# Altium PCB pcb-lcd-cnc.PcbDoc
Units mm, origin at the board's own origin, x right, y up, seen from the top; angles counter-clockwise.
Board outline 96.9 x 63.14 mm, 2 copper layers (Top Layer, Bottom Layer); 22 components, 40 nets, 120 pads, 47 vias.
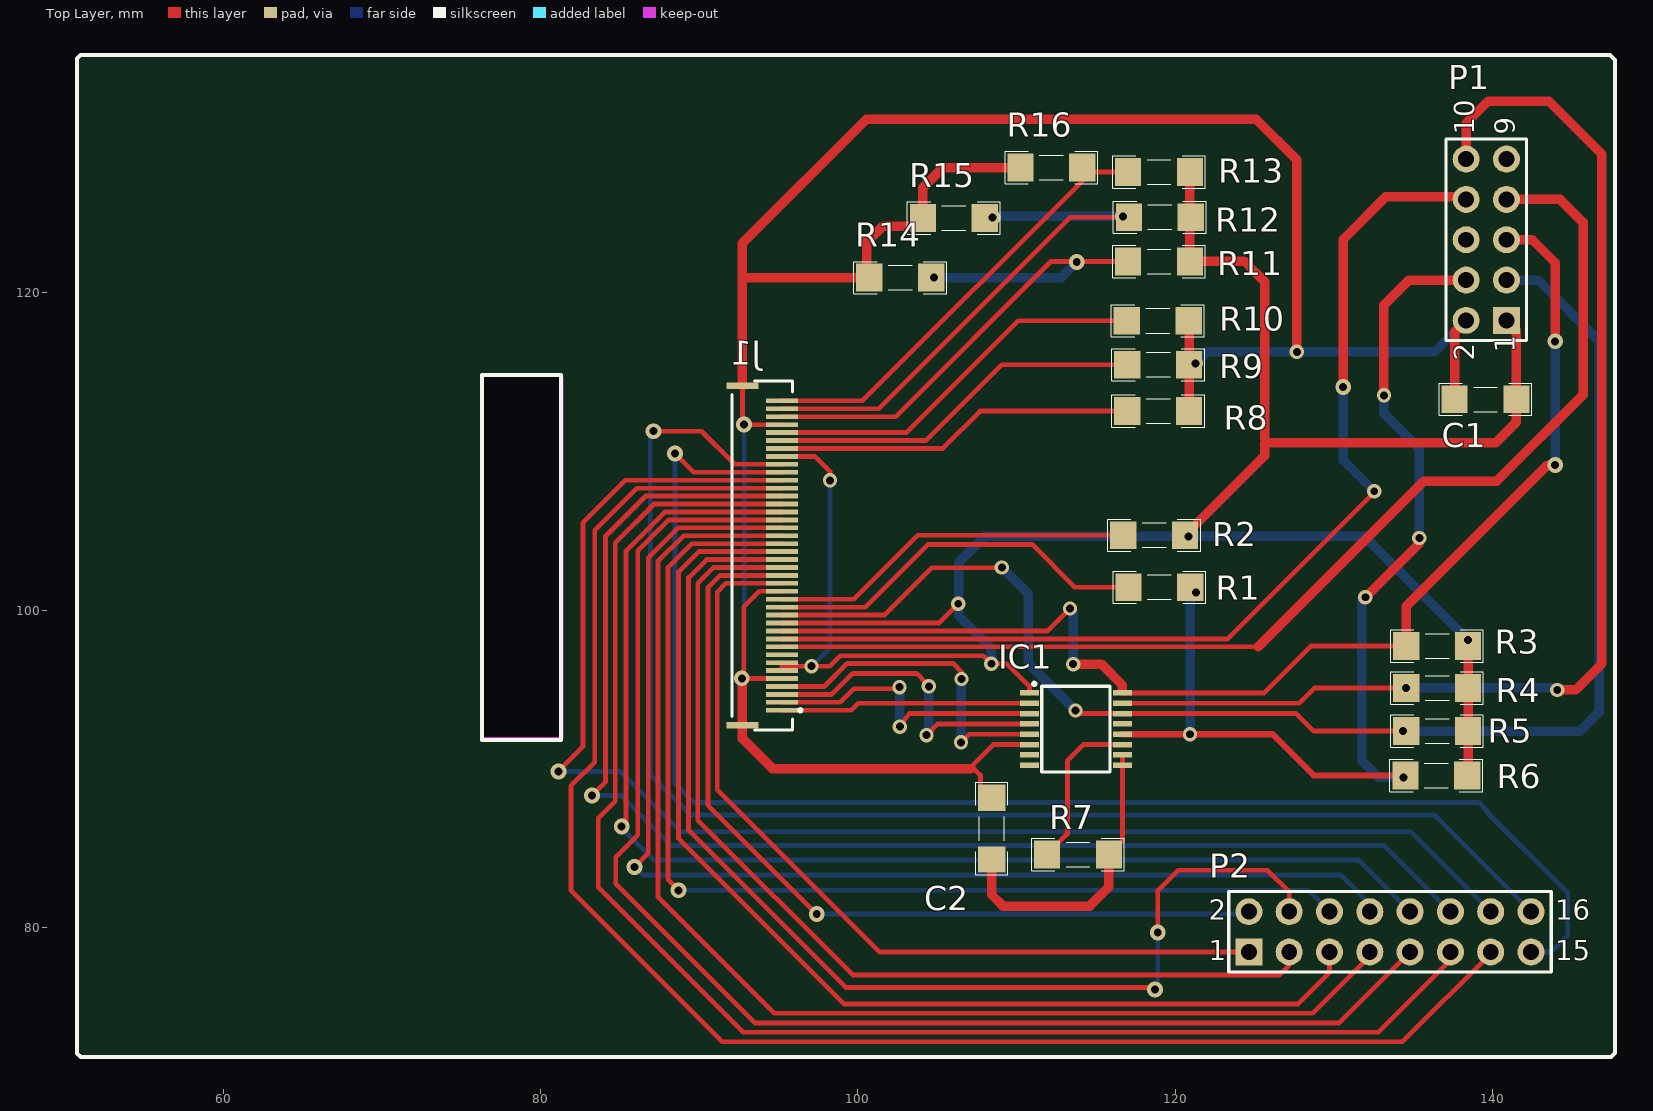
[diagram p0: Top Layer view]
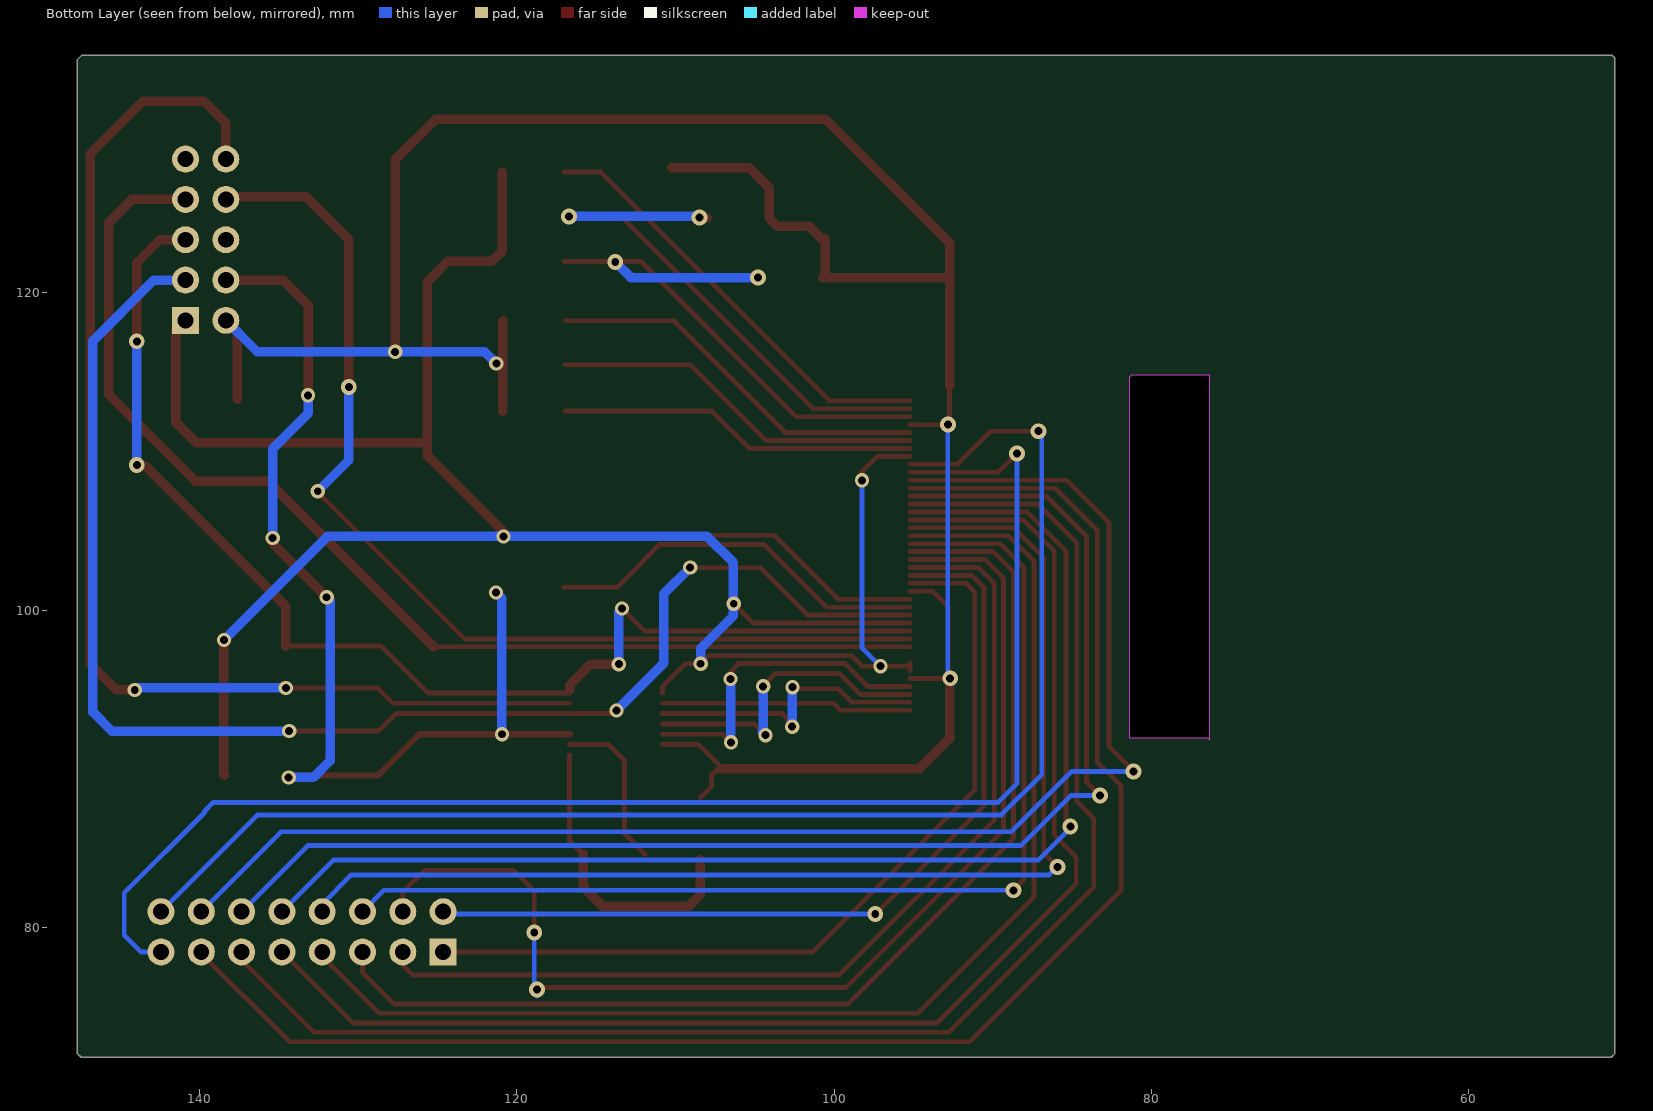
[diagram p1: Bottom Layer view, seen from below]
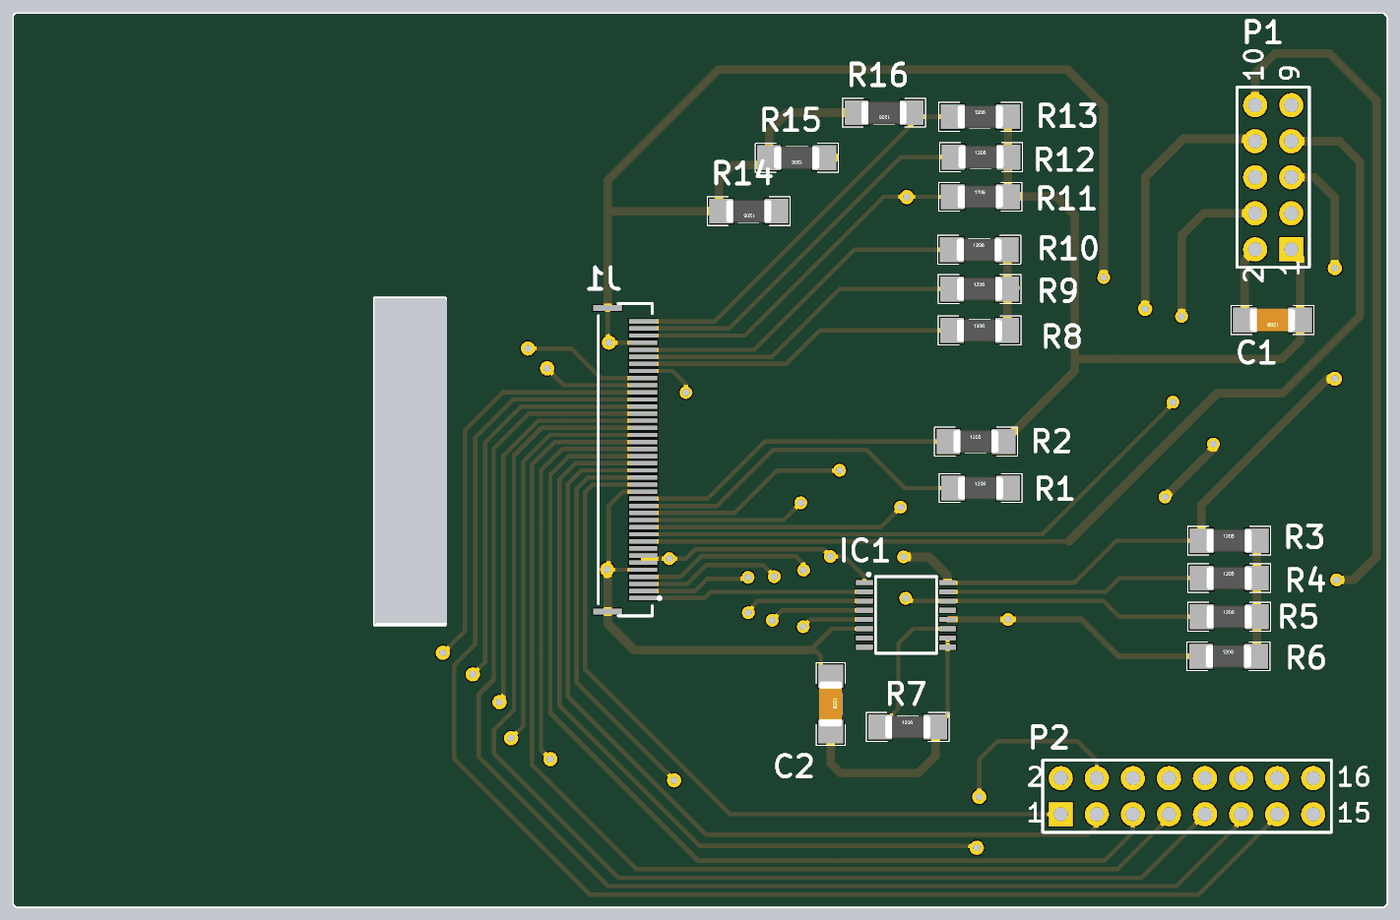
[diagram p2: 3D render of the assembled board from above, using the file's embedded part models]

## Layer stack, top to bottom
Top Solder: solder mask 0.0102, Solder Resist, Dk 3.5
Top Layer: signal copper 0.0356
Dielectric 1: dielectric 0.32, FR-4, Dk 4.8
Bottom Layer: signal copper 0.0356
Bottom Solder: solder mask 0.0102, Solder Resist, Dk 3.5

## Board outline
51.029,71.831 50.8,72.06 50.8,134.772 51.003,134.976 147.396,134.976 147.701,134.671 147.701,72.085 147.447,71.831
cut-out: 76.327,114.808 81.28,114.808 81.407,114.681 81.407,91.948 76.454,91.948 76.327,91.821

## Design rules (kind name [scope] priority, off if disabled: settings)
Clearance [All] p1: gap=0.1 ignorepadtopadclearanceinfootprint=FALSE
PolygonConnect [All] p1: connectstyle=Relief reliefconductorwidth=0.254 reliefentries=4 polygonreliefangle="90 Angle" airgapwidth=0.254
RoutingVias [All] p1: holewidth=0.711 width=1.27 viastyle="Through Hole" minholewidth=0.711 minwidth=1.27 maxholewidth=0.711 maxwidth=1.27
SolderMaskExpansion [All] p1: expansion=0.102
Width [All] p1: maxlimit=0.6 minlimit=0.2 preferedwidth=0.3
30 further rules are at their usual default settings.

## Components (designator, comment, footprint, x,y, rotation, side; value= is the part's Value field where it differs from the comment)
C1 "0.1uF" CAPC4817X12N 139.548,113.284 r180 top
C2 "0.1uF" CAPC4817X12N 108.433,86.233 r270 top
IC1 "XPT2046" TSSOP16 113.741,92.507 r0 top
J1 "FFC2B28-40-G" GCT_FFC2B28-40-G 93.975,103.44 r90 top
P1 "Header 5X2" HDR2X5 140.868,118.262 r90 top
P2 "Header 8X2" HDR2X8 124.638,78.461 r0 top
R1 "1K" RESC4817X04N 118.999,101.448 r0 top
R2 "1K" RESC4817X04N 118.669,104.724 r0 top
R3 "1K" RESC4817X04N 136.5,97.739 r0 top
R4 "1K" RESC4817X04N 136.5,95.098 r0 top
R5 "1K" RESC4817X04N 136.5,92.38 r0 top
R6 "1K" RESC4817X04N 136.449,89.586 r0 top
R7 "1K" RESC4817X04N 113.868,84.607 r0 top
R8 "1K" RESC4817X04N 118.923,112.547 r0 top
R9 "1K" RESC4817X04N 118.923,115.468 r0 top
R10 "1K" RESC4817X04N 118.897,118.237 r0 top
R11 "1K" RESC4817X04N 118.974,121.971 r0 top
R12 "1K" RESC4817X04N 119.024,124.765 r0 top
R13 "1K" RESC4817X04N 118.974,127.61 r0 top
R14 "1K" RESC4817X04N 102.667,120.955 r180 top
R15 "1K" RESC4817X04N 106.045,124.714 r180 top
R16 "1K" RESC4817X04N 112.192,127.889 r180 top

## Footprints (in the part's own frame and the unit in brackets; to place one, negate y for a bottom-side part, rotate by r counter-clockwise, add the part's x,y. Pads: shape width x height; smd on the part's side, far side on the other; paste and mask are expansions set on the pad)
CAPC4817X12N [mm] "Chip Capacitor, 2-Leads, Body 4/80x1/70mm, IPC Medium Density-Design:Abbas Basereh"
  rect 1.65x1.75 smd: 1(-1.95,0) 2(1.95,0)
  silkscreen extent -2.92,-1.02 2.92,1.02, body extent -1.6,-0.8 1.6,0.8, height 1
GCT_FFC2B28-40-G [mm]
  rect 0.3x2 smd: 1(-9.75,-1.25) 2(-9.25,-1.25) 3(-8.75,-1.25) 4(-8.25,-1.25) 5(-7.75,-1.25) 6(-7.25,-1.25) 7(-6.75,-1.25) 8(-6.25,-1.25) 9(-5.75,-1.25) 10(-5.25,-1.25) 11(-4.75,-1.25) 12(-4.25,-1.25) 13(-3.75,-1.25) 14(-3.25,-1.25) 15(-2.75,-1.25) 16(-2.25,-1.25) 17(-1.75,-1.25) 18(-1.25,-1.25) 19(-0.75,-1.25) 20(-0.25,-1.25) 21(0.25,-1.25) 22(0.75,-1.25) 23(1.25,-1.25) 24(1.75,-1.25) 25(2.25,-1.25) 26(2.75,-1.25) 27(3.25,-1.25) 28(3.75,-1.25) 29(4.25,-1.25) 30(4.75,-1.25) 31(5.25,-1.25) 32(5.75,-1.25) 33(6.25,-1.25) 34(6.75,-1.25) 35(7.25,-1.25) 36(7.75,-1.25) 37(8.25,-1.25) 38(8.75,-1.25) 39(9.25,-1.25) 40(9.75,-1.25)
  rect 0.4x2 smd: S1(-10.7,1.25) S2(10.7,1.25)
  silkscreen extent -11,-2.5 11,1.9
HDR2X5 [mm] "Connector; Header; 5x2 Position"
  rect 1.7x1.7 hole 1: 1(0,0)
  round 1.7 hole 1: 2(0,2.54) 3(2.54,0) 4(2.54,2.54) 5(5.08,0) 6(5.08,2.54) 7(7.62,0) 8(7.62,2.54) 9(10.16,0) 10(10.16,2.54)
  silkscreen extent -1.27,-1.27 11.43,3.81
HDR2X8 [mm] "Connector; Header; 8x2 Position"
  rect 1.7x1.7 hole 1: 1(0,0)
  round 1.7 hole 1: 2(0,2.54) 3(2.54,0) 4(2.54,2.54) 5(5.08,0) 6(5.08,2.54) 7(7.62,0) 8(7.62,2.54) 9(10.16,0) 10(10.16,2.54) 11(12.7,0) 12(12.7,2.54) 13(15.24,0) 14(15.24,2.54) 15(17.78,0) 16(17.78,2.54)
  silkscreen extent -1.27,-1.27 19.05,3.81
RESC4817X04N [mm] "Chip Resistor, 2-Leads, Body 4/80x1/70mm, IPC Medium Density-Design:Abbas Basereh"
  rect 1.65x1.75 smd: 1(-1.95,0) 2(1.95,0)
  silkscreen extent -2.92,-1.02 2.92,1.02, body extent -1.6,-0.8 1.6,0.8, height 1
TSSOP16 [mm]
  rect 1.2x0.35 smd: 1(-2.925,2.275) 2(-2.925,1.625) 3(-2.925,0.975) 4(-2.925,0.325) 5(-2.925,-0.325) 6(-2.925,-0.975) 7(-2.925,-1.625) 8(-2.925,-2.275) 9(2.925,-2.275) 10(2.925,-1.625) 11(2.925,-0.975) 12(2.925,-0.325) 13(2.925,0.325) 14(2.925,0.975) 15(2.925,1.625) 16(2.925,2.275)
  silkscreen extent -2.72,-2.7 2.15,2.95

## Part data
C1 C2: library part "CAP SMD 1206", "CAP 1206", Data=16-12-2016, Desc.="CAP SMD 1206", Designer="Abbas Basereh"
IC1: "RASPBERRY PI 3.5 TFT DISPLAY", Package=Package, Availability="Not in stock", Check_prices=https://www.snapeda.com/parts/XPT2046/Xptek/view-part/?ref=eda, MF=Xptek, MP=XPT2046, Price=None, SnapEDA_Link=https://www.snapeda.com/parts/XPT2046/Xptek/view-part/?ref=snap
J1: "40 Position FFC, FPC Connector Contacts, Top and Bottom 0.020 _0.50mm_ Surface Mount, Right Angle", Package="Package Analog Devices", Availability=Unavailable, MF="Global Connector Technology", MP=FFC2B28-40-G, Price=None, SnapEDA_Link=https://www.snapeda.com/parts/FFC2B28-40-G/Global%20Connector%20Technology/view-part/4223068/?ref=snap
P1: "Header, 5-Pin, Dual row", LatestRevisionDate=17-Jul-2002, LatestRevisionNote="Re-released for DXP Platform.", Publisher="Altium Limited"
P2: "Header, 8-Pin, Dual row", LatestRevisionDate=17-Jul-2002, LatestRevisionNote="Re-released for DXP Platform.", Publisher="Altium Limited"
R1 R2 R3 R4 R5 R6 R7 R8 R9 R10 R11 R12 R13 R14 R15 R16: library part "RES 1206 0.25W", "RES 1206", Data=16-12-2016, Desc.="RES SMD 1206", Designer="Abbas Basereh"

## Via types
v1: diameter 0.9, hole 0.5, Top Layer to Bottom Layer, 28 vias
v2: diameter 1, hole 0.5, Top Layer to Bottom Layer, 19 vias

## Nets (pads, with @x,y where several pads share a name; then routed paths per layer and width w, separated by ;. In a path a pad name is that pad's centre, name@x,y a point inside that pad or via, vN(x,y) a via of type N, cw(c..) or ccw(c..) an arc to the next point about the centre after c; other vN are vias at no path point)
cs_lcd: J1.9 P1.7 | length 73.3
  Top Layer w0.3: J1.9 125.223,97.69
  Top Layer w0.6: 125.223,97.69 135.661,108.128 140.259,108.128 145.694,113.563 145.694,124.435 144.247,125.882 P1.7
cs_touch: IC1.15 P1.10 R4.1 | length 76.2
  Top Layer w0.3: IC1.15 127.812,94.132 128.778,95.098 v1(134.55,95.098)
  Top Layer w0.6: P1.10 138.328,130.683 139.725,132.08 143.535,132.08 146.888,128.727 146.888,96.622 145.237,94.971 v1(144.069,94.971)
  Bottom Layer w0.6: v1(134.55,95.098) v1@144.069,95.098
d0: J1.17 P2.1 | length 54.5
  Top Layer w0.3: J1.17 91.682,101.69 91.135,101.143 91.135,88.671 101.346,78.461 P2.1
d1: J1.18 P2.2 | length 55.7
  Top Layer w0.3: J1.18 91.319,102.19 90.551,101.422 90.551,87.706 v2(97.409,80.848)
  Bottom Layer w0.3: v2(97.409,80.848) 124.485,80.848 P2.2
d2: J1.19 P2.3 | length 63
  Top Layer w0.3: J1.19 90.904,102.69 89.916,101.702 89.916,86.766 99.67,77.013 126.568,77.013 127.178,77.622 P2.3
d3: J1.20 P2.4 | length 73.5
  Top Layer w0.3: J1.20 90.464,103.19 89.332,102.057 89.332,86.131 99.238,76.225 118.313,76.225 v2@118.618,75.921 ; v2(118.897,79.68) 118.897,82.321 120.193,83.617 125.806,83.617 127.178,82.245 P2.4
  Bottom Layer w0.3: v2(118.72,76.098) 118.72,75.692 118.897,75.87 v2(118.897,79.68)
d4: J1.21 P2.5 | length 71.3
  Top Layer w0.3: J1.21 89.974,103.69 88.697,102.413 88.697,85.598 99.111,75.184 127.737,75.184 129.718,77.165 P2.5
d5: J1.22 P2.6 | length 70
  Top Layer w0.3: v2(88.697,82.347) 88.036,83.007 88.036,102.692 89.534,104.19 J1.22
  Bottom Layer w0.3: v2(88.697,82.347) 128.372,82.347 P2.6
d6: J1.23 P2.7 | length 79.3
  Top Layer w0.3: J1.23 89.018,104.69 87.401,103.073 87.401,81.94 94.742,74.6 128.651,74.6 132.258,78.207 P2.7
d7: J1.24 P2.8 | length 76.7
  Top Layer w0.3: v2@86.042,83.934 86.792,84.684 86.792,103.302 88.68,105.19 J1.24
  Bottom Layer w0.3: v2(85.928,83.82) 86.436,83.312 130.429,83.312 132.258,81.483 P2.8
d8: J1.25 P2.9 | length 87
  Top Layer w0.3: J1.25 88.088,105.69 86.131,103.734 86.131,85.827 84.734,84.43 84.734,82.753 93.497,73.99 130.327,73.99 P2.9
d9: J1.26 P2.10 | length 80.1
  Top Layer w0.3: v2(85.115,86.36) 85.395,86.639 85.395,103.734 87.851,106.19 J1.26
  Bottom Layer w0.3: v2@84.938,86.36 v2(85.115,86.36) ; v2@85.344,86.03 87.122,84.252 131.547,84.252 P2.10
d10: J1.27 P2.11 | length 93.6
  Top Layer w0.3: J1.27 87.157,106.69 84.709,104.242 84.709,87.96 83.642,86.893 83.642,82.525 92.761,73.406 132.791,73.406 137.338,77.953 P2.11
d11: J1.28 P2.12 | length 86
  Top Layer w0.3: v2(83.236,88.316) 84.099,89.179 84.099,104.673 86.616,107.19 J1.28
  Bottom Layer w0.3: v2(83.236,88.316) 85.09,88.316 88.24,85.166 133.172,85.166 P2.12
d12: J1.29 P2.13 | length 100.5
  Top Layer w0.3: J1.29 86.074,107.69 83.414,105.029 83.414,90.424 81.915,88.925 81.915,82.347 91.465,72.796 134.315,72.796 139.878,78.359 P2.13
d13: J1.30 P2.14 | length 92.4
  Top Layer w0.3: v2(81.128,89.84) 82.677,91.389 82.677,105.512 85.355,108.19 J1.30
  Bottom Layer w0.3: v2(81.128,89.84) 85.014,89.84 88.824,86.03 134.849,86.03 P2.14
d14: J1.31 P2.15 | length 92.6
  Top Layer w0.3: v2(88.468,109.88) 89.659,108.69 J1.31
  Bottom Layer w0.3: v2(88.468,109.88) 88.468,89.078 89.662,87.884 139.116,87.884 139.675,87.325 139.675,87.249 144.729,82.194 144.729,79.502 143.688,78.461 P2.15
d15: J1.32 P2.16 | length 89.8
  Top Layer w0.3: v2(87.122,111.277) 90.145,111.277 92.232,109.19 J1.32
  Bottom Layer w0.3: v2@86.919,111.277 86.919,89.637 89.459,87.097 136.322,87.097 P2.16 ; v2@87.071,111.328 v2(87.122,111.277)
GND: C1.2 C2.1 IC1.6 J1.5 J1.16 J1.37 J1.S1 J1.S2 P1.2 R8.2 R9.2 R10.2 R14.2 R15.2 R16.2 | length 169.4
  Top Layer w0.3: v2@92.725,95.707 92.812,95.794 92.812,100.203 93.798,101.19 J1.16 ; J1.S2 92.725,111.797 v2(92.832,111.69) J1.37 ; v2@92.767,95.69 J1.5 ; C2.1 107.721,88.894 107.721,89.611 107.315,90.018 107.01,90.018 108.524,91.532 IC1.6
  Top Layer w0.6: v2@92.725,95.707 J1.S1 92.725,91.908 94.615,90.018 107.112,90.018 ; J1.S2 92.725,120.955 ; R16.2 105.359,127.889 104.095,126.625 R15.2 103.587,124.206 101.575,124.206 100.762,123.393 100.559,123.393 100.559,121.113 R14.2 92.725,120.955 ; R10.2 120.873,118.212 R9.2@120.873,115.545 ; R8.2 R9.2 ; v1(127.66,116.281) 127.66,128.372 125.095,130.937 100.533,130.937 92.725,123.128 92.725,120.955 ; C1.2 137.598,117.532 P1.2
  Bottom Layer w0.3: v2(92.685,95.707) 92.634,95.707 92.832,95.906 v2(92.832,111.69)
  Bottom Layer w0.6: v1(121.285,115.545) 122.022,116.281 v1(127.66,116.281) 136.347,116.281 P1.2
miso: IC1.12 P1.4 R1.2 R6.1 | length 68.2
  Top Layer w0.3: v1(134.372,89.459) R6.1
  Top Layer w0.4: IC1.12 v1(120.929,92.182) 126.131,92.182 128.727,89.586 R6.1
  Top Layer w0.6: v1(131.978,100.813) 135.382,104.216 v1(135.382,104.546) ; v1(133.147,113.538) 133.147,119.228 134.722,120.802 P1.4
  Bottom Layer w0.6: v1(120.929,92.182) 120.929,100.736 v1(121.31,101.117) ; v1(131.978,100.813) 131.75,100.584 131.75,90.526 132.817,89.459 v1(134.372,89.459) ; v1(133.147,113.538) 133.147,112.395 135.382,110.16 v1(135.382,104.546)
mosi: IC1.14 J1.13 P1.3 R5.1 | length 91
  Top Layer w0.3: J1.13 101.671,99.69 104.648,102.667 v1@109.017,102.667 ; v1(113.716,93.675) 113.909,93.482 IC1.14 127.625,93.482 128.727,92.38 v1(134.341,92.38) R5.1
  Bottom Layer w0.6: v1(109.068,102.692) 110.744,101.016 110.744,96.647 v1(113.716,93.675) ; v1(134.341,92.38) 145.517,92.38 146.71,93.574 146.71,116.967 142.875,120.802 P1.3
NetC2_2: C2.2 IC1.9 IC1.10 R7.2 | length 19.1
  Top Layer w0.3: R7.2 116.666,85.455 IC1.9 IC1.10
  Top Layer w0.6: C2.2 108.433,82.067 109.144,81.356 114.605,81.356 115.818,82.57 R7.2
NetIC1_11: IC1.11 R7.1 | length 10.3
  Top Layer w0.3: R7.1 113.208,85.897 113.208,90.526 114.214,91.532 IC1.11
NetJ1_14: J1.14 R1.1 | length 24.6
  Top Layer w0.3: J1.14 100.469,100.19 104.419,104.14 110.973,104.14 113.665,101.448 R1.1
NetJ1_15: J1.15 R2.1 | length 23.2
  Top Layer w0.3: J1.15 99.75,100.69 103.784,104.724 R2.1
NetJ1_34: J1.34 R8.1 | length 22.7
  Top Layer w0.3: J1.34 105.338,110.19 107.696,112.547 R8.1
NetJ1_35: J1.35 R9.1 | length 23.7
  Top Layer w0.3: J1.35 104.289,110.69 109.068,115.468 R9.1
NetJ1_36: J1.36 R10.1 | length 24.6
  Top Layer w0.3: J1.36 103.062,111.19 110.109,118.237 R10.1
NetJ1_38: J1.38 R11.1 R14.1 | length 35.4
  Top Layer w0.3: J1.38 102.385,112.19 112.166,121.971 R11.1
  Top Layer w0.6: R14.1 v2(104.8,120.955)
  Bottom Layer w0.6: v2(104.8,120.955) 112.801,120.955 v2(113.792,121.945)
NetJ1_39: J1.39 R12.1 R15.1 | length 35.3
  Top Layer w0.3: J1.39 101.311,112.69 113.386,124.765 R12.1@116.713,124.765
  Top Layer w0.6: R15.1 108.458,124.714 v2(108.483,124.739)
  Bottom Layer w0.6: v2(108.483,124.739) 108.56,124.816 v2(116.713,124.816)
NetJ1_40: J1.40 R13.1 R16.1 | length 27.8
  Top Layer w0.3: J1.40 100.287,113.19 114.706,127.61 R13.1
NetLabel103: P1.6
NetLabel108: P1.9
rs: J1.10 P1.8 | length 66.9
  Top Layer w0.2: v1(132.537,107.493) v1@132.613,107.493
  Top Layer w0.3: J1.10 123.31,98.19 v1@132.613,107.493 ; P1.8@138.151,126.06 P1.8
  Top Layer w0.6: v2(130.581,114.071) 130.581,123.368 133.274,126.06 P1.8@138.151,126.06
  Bottom Layer w0.6: v2(130.581,114.071) 130.581,109.449 v1(132.537,107.493)
sck: IC1.16 J1.11 P1.5 R3.1 | length 77.6
  Top Layer w0.2: IC1.16 116.666,94.971
  Top Layer w0.3: J1.11 111.949,98.69 v1(113.36,100.101) ; IC1.16 125.592,94.782 128.549,97.739 R3.1
  Top Layer w0.6: v1(113.563,96.596) 115.341,96.596 116.666,95.271 116.666,94.971 ; R3.1 134.55,100.234 143.459,109.144 v2(143.942,109.144) ; P1.5 142.494,123.342 143.942,121.895 v2(143.942,116.942)
  Bottom Layer w0.6: v1(113.36,100.101) 113.563,99.898 v1(113.563,96.596) ; v2(143.942,109.144) v2(143.942,116.942)
VCC: C1.1 IC1.1 J1.6 J1.7 J1.12 J1.33 P1.1 R2.2 R3.2 R4.2 R5.2 R6.2 R11.2 R12.2 R13.2 | length 147.9
  Top Layer w0.3: J1.6 95.225,96.469 ; J1.7 95.225,96.469 ; J1.12 105.108,99.19 v1(106.324,100.406) ; J1.33 97.295,109.69 98.247,108.737 v1(98.247,108.179) ; IC1.1 110.816,95.178 109.372,96.622 v1(108.407,96.622) 107.899,97.13 98.882,97.13 98.222,96.469 v1(97.079,96.469) 95.225,96.469
  Top Layer w0.6: R2.2 125.628,109.734 125.628,110.541 140.183,110.541 141.498,111.856 C1.1 141.498,117.633 P1.1 ; R13.2 120.924,122.612 121.552,121.983 124.346,121.983 125.628,120.701 125.628,110.846 ; R6.2 138.45,89.637 R5.2 R4.2 R3.2 v1(138.45,98.126)
  Bottom Layer w0.3: v1(97.079,96.469) 98.247,97.638 v1(98.247,108.179)
  Bottom Layer w0.6: v1(106.324,100.406) 106.35,100.381 106.35,99.644 108.407,97.587 v1(108.407,96.622) ; v1@106.35,100.406 106.35,102.997 108.001,104.648 v1(120.828,104.648) 131.928,104.648 v1(138.45,98.126)
x+: IC1.2 J1.1 | length 15.8
  Top Layer w0.3: J1.1 99.583,93.69 100.025,94.132 IC1.2
x-: IC1.4 J1.3 | length 19.9
  Top Layer w0.3: J1.3 98.347,94.69 99.67,96.012 103.708,96.012 v1@104.318,95.402 ; v1(104.318,92.126) 105.024,92.832 IC1.4
  Bottom Layer w0.6: v1(104.318,92.126) 104.521,92.329 104.47,92.38 v1(104.47,95.199)
y+: IC1.3 J1.2 | length 18.9
  Top Layer w0.3: J1.2 98.889,94.19 99.746,95.047 102.387,95.047 102.286,95.148 v1(102.616,95.148) ; v1(102.641,92.659) 103.235,93.482 IC1.3
  Bottom Layer w0.6: v1(102.641,92.659) v1@102.641,95.021
y-: IC1.5 J1.4 | length 21.4
  Top Layer w0.3: J1.4 97.882,95.19 99.339,96.647 105.994,96.647 106.528,96.114 v1(106.528,95.656) ; v1(106.502,91.669) 107.015,92.182 IC1.5
  Bottom Layer w0.6: v1(106.502,91.669) 106.502,95.783 106.528,95.758 v1(106.528,95.656)
pads on no net: IC1.7 IC1.8 IC1.13 J1.8

## Silkscreen, mask and mechanical layers (free items; w line width, h text height)
Top Overlay:
  lines w0.254: 50.8,72.06 50.8,134.772 51.003,134.976 147.396,134.976 147.701,134.671 147.701,72.085 147.447,71.831 51.029,71.831 50.8,72.06 ; 76.327,91.821 76.327,114.808 81.28,114.808 81.28,91.821 76.327,91.821
Mechanical 2:
  lines w0.013: 51.749,72.358 51.749,134.358 146.749,134.358 146.749,72.358 51.749,72.358 ; 76.365,91.834 76.365,114.834 81.365,114.834 81.365,91.834 76.365,91.834 ; 91.634,92.058 91.634,115.058 96.634,115.058 96.634,92.058 91.634,92.058

## Text inside footprints (layer, text, board x,y; h text height)
P1: Top Overlay "10" at 138.836,129.946 h1.27 r90; Top Overlay "9" at 141.376,129.946 h1.27 r90; Top Overlay "1" at 141.376,116.23 h1.27 r90; Top Overlay "2" at 138.836,115.722 h1.27 r90
P2: Top Overlay "16" at 143.942,80.493 h1.27; Top Overlay "15" at 143.942,77.953 h1.27; Top Overlay "1" at 122.098,77.953 h1.27; Top Overlay "2" at 122.098,80.493 h1.27